# Altium PCB HUZZAH32.PcbDoc (part 1 of 2)
Units mm, origin at the board's own origin, x right, y up, seen from the top; angles counter-clockwise.
Board outline 50.95 x 23.01 mm, 2 copper layers (Top Layer, Bottom Layer); 30 components, 43 nets, 184 pads, 134 vias.
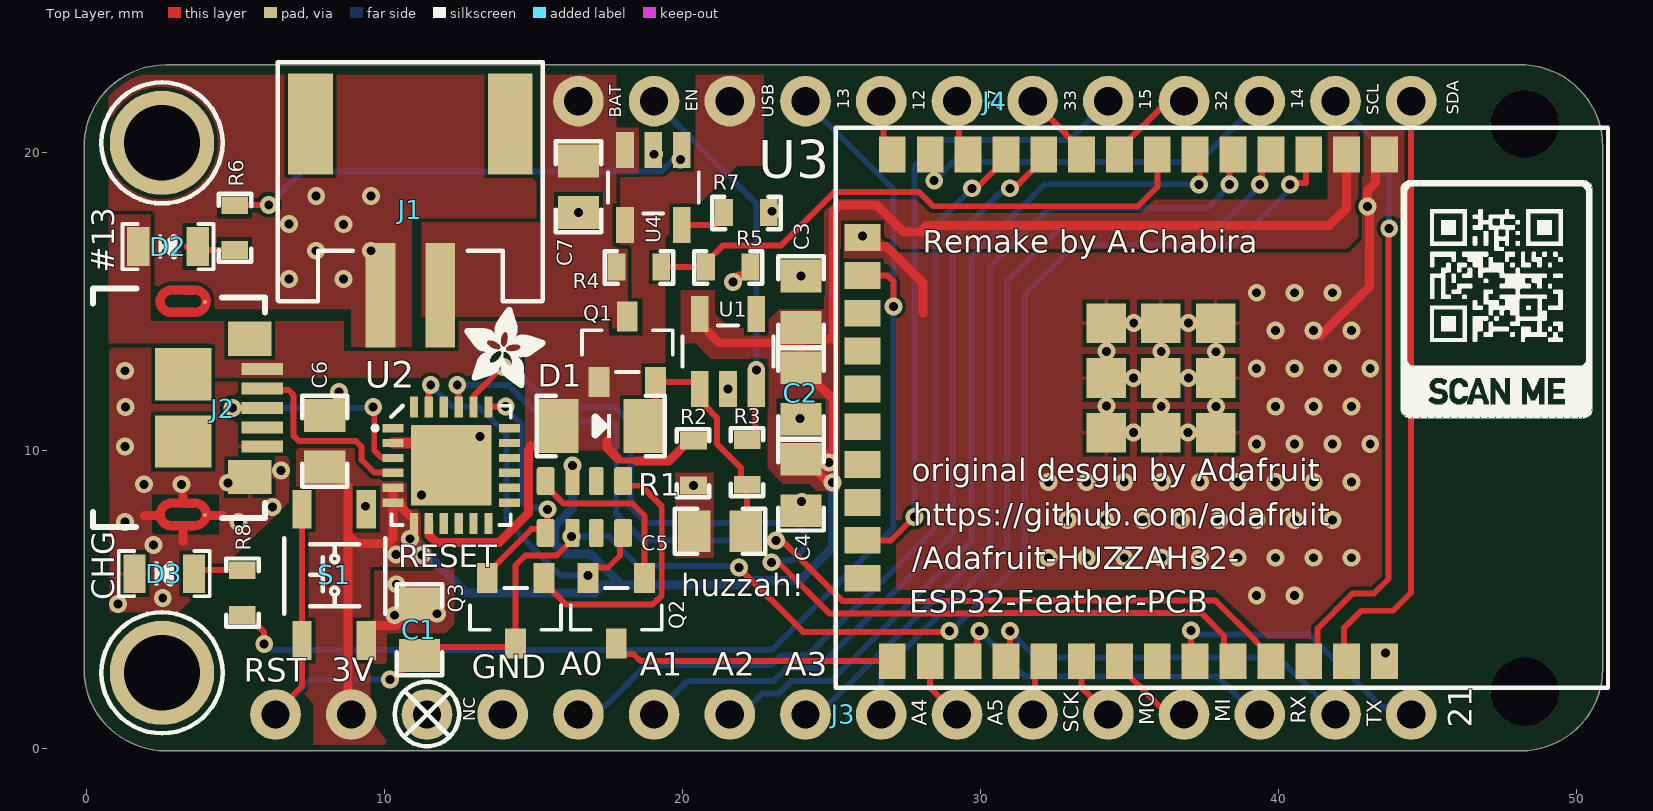
[diagram p0: Top Layer view]
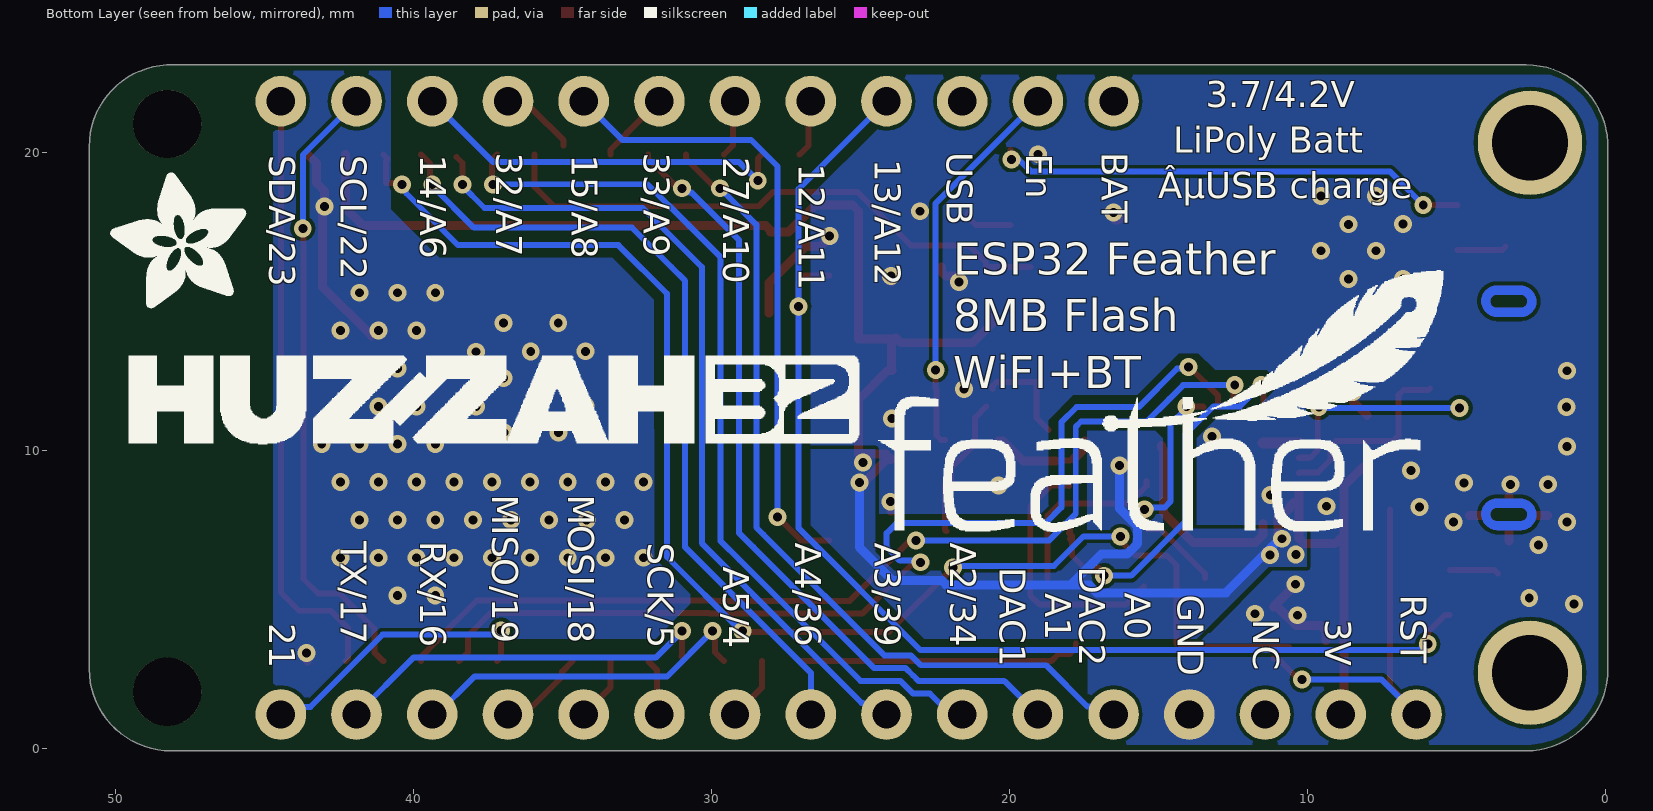
[diagram p1: Bottom Layer view, seen from below]
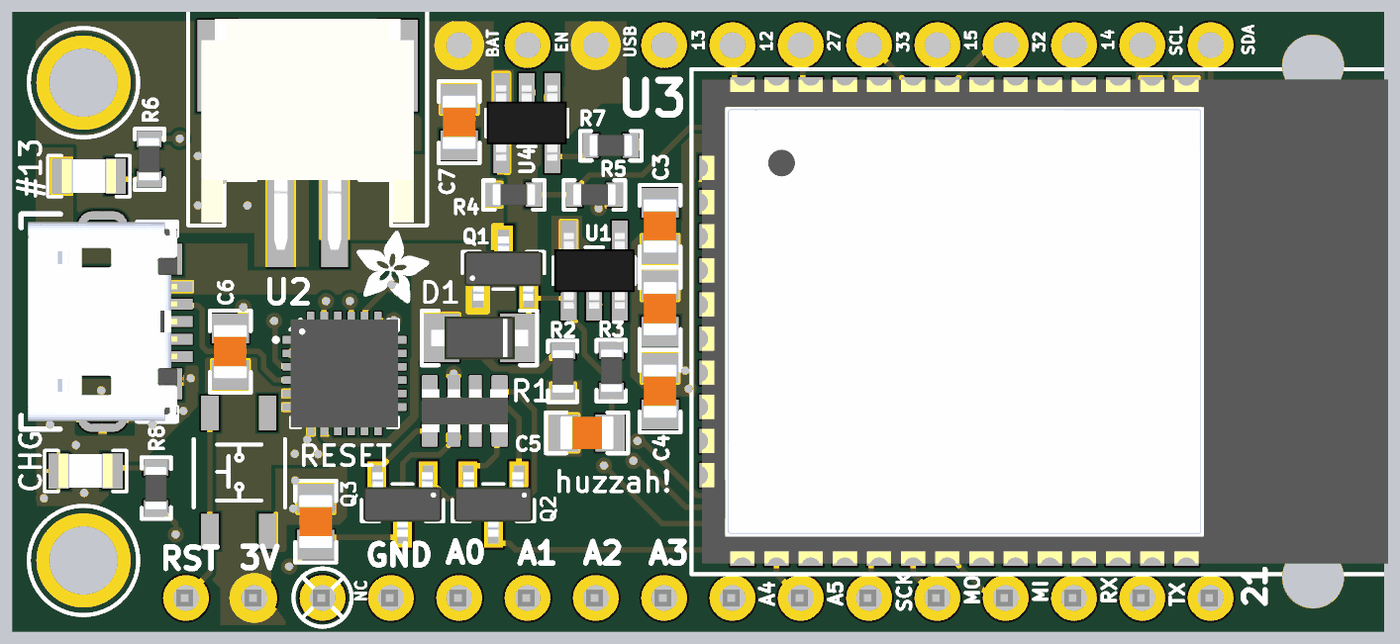
[diagram p2: 3D render of the assembled board from above, using the file's embedded part models]

## Layer stack, top to bottom
Top Solder: solder mask 0.0102, Solder Resist, Dk 3.5
Top Layer: signal copper 0.0356
Dielectric 1: dielectric 0.32, FR-4, Dk 4.8
Bottom Layer: signal copper 0.0356
Bottom Solder: solder mask 0.0102, Solder Resist, Dk 3.5

## Board outline
-0.077,2.667 cw(c0,2.667) -0.075,2.681 -0.075,20.179 cw(c0,20.193) -0.077,20.193 cw(c2.667,20.193) -0.075,20.274 -0.075,20.32 cw(c0,20.32) -0.073,20.34 cw(c2.667,20.193) 2.667,22.937 cw(c2.667,22.86) 2.681,22.935 48.119,22.935 cw(c48.133,22.86) 48.133,22.937 cw(c48.133,20.193) 48.214,22.935 48.26,22.935 cw(c48.26,22.86) 48.28,22.933 cw(c48.133,20.193) 50.877,20.193 cw(c50.8,20.193) 50.875,20.179 50.875,2.681 cw(c50.8,2.667) 50.877,2.667 cw(c48.133,2.667) 48.133,-0.077 cw(c48.133,0) 48.119,-0.075 2.681,-0.075 cw(c2.667,0) 2.667,-0.077 cw(c2.667,2.667)

## Design rules (kind name [scope] priority, off if disabled: settings)
BoardOutlineClearance [All] p1: gap=0.2 ignorepadtopadclearanceinfootprint=FALSE
Clearance [All] p1: gap=0.127 ignorepadtopadclearanceinfootprint=FALSE except(0.25: Arc-Hole Track-Hole SMDPad-Hole THPad-Hole Via-Hole Fill-Hole Poly-Hole Region-Hole Text-Hole)
ComponentClearance [All] p1: gap=0.127 collisioncheckmode=3 verticalgap=0.127 showdistances=TRUE
DiffPairsRouting [All] p1: maxlimit=0.254 minlimit=0.127 mostfreqgap=0.127 toplayer_minwidth=0.127 toplayer_maxwidth=25.4 toplayer_prefwidth=0.127 bottomlayer_minwidth=0.127 bottomlayer_maxwidth=25.4 bottomlayer_prefwidth=0.127 maxuncoupledlength=12.7
Height [All] p1: minheight=0 maxheight=1816.048 prefheight=12.7
HoleSize [All] p1: absolutevalues=TRUE maxlimit=6.3 minlimit=0.3 maxpercent=80.000 minpercent=20.000
HoleToHoleClearance [All] p1: gap=0.25 allowstackedmicrovias=FALSE
MinimumAnnularRing [All] p1: minimumring=0.076
MinimumSolderMaskSliver [All] p1: minsoldermaskwidth=0
PlaneClearance [All] p1: clearance=0.127
PlaneConnect PlaneConnectPowerPads [InPadClass('PowerPads')] p1: planeconnectstyle=Direct reliefexpansion=0.508 reliefentries=4 reliefconductorwidth=0.254 reliefairgap=0.254
PlaneConnect [All] p2: pad.planeconnectstyle=Relief pad.reliefexpansion=0.3 pad.reliefentries=4 pad.reliefconductorwidth=0.127 pad.reliefairgap=0.127 via.planeconnectstyle=Direct via.reliefexpansion=0.3 via.reliefentries=4 via.reliefconductorwidth=0.127 via.reliefairgap=0.127
PolygonConnect PolygonConnect_1 [IsNamedPolygon('GND_L01_THERMAL') or IsNamedPolygon('GND_L01_P018')] p1: thpad.connectstyle=Relief thpad.reliefconductorwidth=0.127 thpad.reliefentries=4 thpad.polygonreliefangle="90 Angle" thpad.airgapwidth=0.254 smdpad.connectstyle=Relief smdpad.reliefconductorwidth=0.127 smdpad.reliefentries=4 smdpad.polygonreliefangle="90 Angle" smdpad.airgapwidth=0.127 via.connectstyle=Direct via.reliefconductorwidth=0.127 via.reliefentries=4 via.polygonreliefangle="90 Angle" via.airgapwidth=0.127
PolygonConnect PolygonConnectPowerPads [All vs (InPadClass('PowerPads'))] p2: connectstyle=Direct reliefconductorwidth=0.254 reliefentries=4 polygonreliefangle="90 Angle" airgapwidth=0.254
PolygonConnect [All] p3: connectstyle=Direct reliefconductorwidth=0.127 reliefentries=4 polygonreliefangle="90 Angle" airgapwidth=0.127
RoutingVias [All] p1: holewidth=0.3 width=0.6 viastyle="Through Hole" minholewidth=0.3 minwidth=0.6 maxholewidth=0.6 maxwidth=6.6
SilkToSilkClearance [All] p1: silktosilkclearance=0
SilkToSolderMaskClearance [IsPad] p1: minsilkscreentomaskgap=0.127 clearancetoexposedcopper=TRUE
SolderMaskExpansion [All] p1: expansion=0.075 istentingtop=FALSE
Width [All] p1: maxlimit=25.4 minlimit=0.127 preferedwidth=0.127 minimp=50.000000 maximp=50.000000 favimp=50.000000
20 further rules are at their usual default settings.

## Classes and differential pairs
net class Power: 3V3 GND VBAT VBUS

## Components (designator, comment, footprint, x,y, rotation, side; value= is the part's Value field where it differs from the comment)
C1 "1uF" CERAMIC_0805 11.176,3.988 r270 top
C2 "10uF" CERAMIC_0805 23.978,11.913 r90 top
C3 "1uF" CERAMIC_0805 23.978,14.986 r270 top
C4 "10uF" CERAMIC_0805 23.978,8.839 r90 top
C5 "10uF" CERAMIC_0805 21.26,7.29 r0 top
C6 "10uF" CERAMIC_0805 8.001,10.312 r90 top
C7 "10uF" CERAMIC_0805 16.51,18.847 r90 top
D1 "Schottky" SOD-123F 17.272,10.82 r180 top
D2 "ORANGE" LED_0805 2.743,16.84 r0 top
D3 "RED" LED_0805 2.616,5.867 r0 top locked
J1 "JST PH Conn" JST_PH_CONN_F_SMD 10.874,14.905 r0 top
J2 "USB micro" USB_CONN 3.251,11.43 r270 top locked
J3 "HDR_16" HDR_16 6.35,1.143 r90 top locked
J4 "HDR_16" HDR_12 16.51,21.717 r90 top locked
Q1 "P Channel MOSFET" SOT23-3 18.151,13.396 r0 top
Q2 "BJT" SOT23-3 17.78,4.623 r180 top
Q3 "BJT" SOT23-3 14.402,4.623 r180 top
R1 "10k" SMD_4_RES_ARRAY_1206 16.713,8.103 r270 top
R2 "100k" R_0603 20.371,9.576 r90 top
R3 "100k" R_0603 22.174,9.601 r90 top
R4 "100k" R_0603 18.542,16.154 r180 top
R5 "100k" R_0603 21.539,16.154 r180 top
R6 "1k" R_0603 4.978,17.475 r270 top locked
R7 "4.7k" R_0603 22.149,17.983 r180 top
R8 "1k" R_0603 5.232,5.232 r270 top locked
S1 "Push Button" SW_PB_6643 7.239,3.626 r90 top locked
U1 "3V3 LDO" SOT23-5 21.529,13.32 r0 top
U2 "USB to UART converter" QFN_24 12.243,9.5 r0 top
U3 "ESP32-WROOM" ESP32_WROOM_MODULE 34.798,11.43 r270 top locked
U4 "IC BATT Conctroller" SOT23-5 19.025,18.821 r180 top

## Footprints (in the part's own frame and the unit in brackets; to place one, negate y for a bottom-side part, rotate by r counter-clockwise, add the part's x,y. Pads: shape width x height; smd on the part's side, far side on the other; paste and mask are expansions set on the pad)
CERAMIC_0805 [mm]
  rect 1.1x1.38 smd: 1(-0.863,0) 2(0.863,0)
  silkscreen extent -1.52,-0.76 1.52,0.76, body extent -1,-0.63 1,0.62, height 1.35
ESP32_WROOM_MODULE [mm]
  rect 1.2x0.9 smd: 1(-8.5,8.755) 2(-8.5,7.485) 3(-8.5,6.215) 4(-8.5,4.945) 5(-8.5,3.675) 6(-8.5,2.405) 7(-8.5,1.135) 8(-8.5,-0.135) 9(-8.5,-1.405) 10(-8.5,-2.675) 11(-8.5,-3.945) 12(-8.5,-5.215) 13(-8.5,-6.485) 14(-8.5,-7.755) 25(8.5,-7.755) 26(8.5,-6.485) 27(8.5,-5.215) 28(8.5,-3.945) 29(8.5,-2.675) 30(8.5,-1.405) 31(8.5,-0.135) 32(8.5,1.135) 33(8.5,2.405) 34(8.5,3.675) 35(8.5,4.945) 36(8.5,6.215) 37(8.5,7.485) 38(8.5,8.755)
  rect 0.9x1.2 smd: 15(-5.715,-8.755) 16(-4.445,-8.755) 17(-3.175,-8.755) 18(-1.905,-8.755) 19(-0.635,-8.755) 20(0.635,-8.755) 21(1.905,-8.755) 22(3.175,-8.755) 23(4.445,-8.755) 24(5.715,-8.755)
  rect 1.33x1.33 smd: 39(-2.835,3.09) 39(-2.835,1.255) 39(-2.835,-0.58) 39(-1,3.09) 39(-1,1.255) 39(-1,-0.58) 39(0.835,3.09) 39(0.835,1.255) 39(0.835,-0.58)
  silkscreen extent -9.4,-9.65 9.4,16.26, body extent -9,-9.25 9,16.25, height 3.2
HDR_12 [mm]
  round 1.7 hole 0.95: 1(0,0) 2(0,-2.54) 3(0,-5.08) 4(0,-7.62) 5(0,-10.16) 6(0,-12.7) 7(0,-15.24) 8(0,-17.78) 9(0,-20.32) 10(0,-22.86) 11(0,-25.4) 12(0,-27.94)
  body extent -1.17,-28.94 1.17,1.14, height 2.33
HDR_16 [mm]
  round 1.7 hole 0.95: 1(0,-38.1) 2(0,-35.56) 3(0,-33.02) 4(0,-30.48) 5(0,-27.94) 6(0,-25.4) 7(0,-22.86) 8(0,-20.32) 9(0,-17.78) 10(0,-15.24) 11(0,-12.7) 12(0,-10.16) 13(0,-7.62) 14(0,-5.08) 15(0,-2.54) 16(0,0)
  body extent -1.24,-39.32 1.24,1.32, height 2.29
JST_PH_CONN_F_SMD [mm]
  rect 1x3.5 smd: 1(-1,0.3) 2(1,0.3)
  rect 1.5x3.4 smd: S1(3.35,6.05) S2(-3.35,6.05)
  silkscreen extent -4.45,0.1 4.44,8.13, body extent -3.95,-0.8 3.95,7.8, height 5.7
LED_0805 [mm]
  rect 0.75x1.3 smd: 1(1,0) 2(-1,0)
  silkscreen extent -1.52,-0.76 1.52,0.76, body extent -1,-0.62 1,0.62, height 0.73
QFN_24 [mm]
  rrect10% 0.7x0.28 smd paste+0 mask+0.05: 1(-1.955,1.25) 2(-1.955,0.75) 3(-1.955,0.25) 4(-1.955,-0.25) 5(-1.955,-0.75) 6(-1.955,-1.25) 13(1.955,-1.25) 14(1.955,-0.75) 15(1.955,-0.25) 16(1.955,0.25) 17(1.955,0.75) 18(1.955,1.25)
  rrect10% 0.28x0.7 smd paste+0 mask+0.05: 7(-1.25,-1.955) 8(-0.75,-1.955) 9(-0.25,-1.955) 10(0.25,-1.955) 11(0.75,-1.955) 12(1.25,-1.955) 19(1.25,1.955) 20(0.75,1.955) 21(0.25,1.955) 22(-0.25,1.955) 23(-0.75,1.955) 24(-1.25,1.955)
  rrect2% 2.7x2.7 smd paste-2 mask+0.06: 25(0,0)
  silkscreen extent -2.62,-2 2,2, body extent -2,-2 2,2, height 0.77
R_0603 [mm]
  rect 0.6x0.9 smd: 1(-0.75,0) 2(0.75,0)
  silkscreen extent -1.14,-0.53 1.14,0.56, body extent -0.8,-0.4 0.8,0.4, height 0.85
SMD_4_RES_ARRAY_1206 [mm]
  rrect20% 0.93x0.6 smd mask+0.051: 1(-0.87,1.3) 2(0.87,1.3) 7(-0.87,-1.3) 8(0.87,-1.3)
  rrect20% 0.93x0.48 smd mask+0.051: 3(-0.87,0.4) 4(0.87,0.4) 5(-0.87,-0.4) 6(0.87,-0.4)
  body extent -0.8,-1.6 0.8,1.6, height 0.6
SOD-123F [mm]
  rect 1.34x1.8 smd: 1(1.43,0) 2(-1.43,0)
  silkscreen extent -2.13,-1.02 2.16,1.02, body extent -1.8,-0.8 1.8,0.8, height 1.15
SOT23-3 [mm]
  rect 0.7x1 smd paste-0.15 mask+0.102: 1(-0.95,-1.1) 2(0.95,-1.1) 3(0,1.1)
  silkscreen extent -1.52,-0.76 1.52,0.64, body extent -1.45,-1.2 1.45,1.2, height 1.1
SOT23-5 [mm]
  rect 0.59x1.21 smd: 1(-0.95,-1.255) 2(0,-1.255) 3(0.95,-1.255) 4(0.95,1.255) 5(-0.95,1.255)
  silkscreen extent -1.52,-0.51 1.52,0.87, body extent -1.49,-1.4 1.5,1.4, height 1.17
SW_PB_6643 [mm]
  rect 1.3x0.65 smd: 1(0,0) 2(4.4,0) 3(0,-2.15) 4(4.4,-2.15)
  silkscreen extent 0.89,-2.79 3.43,0.6, body extent -0.55,-2.78 4.95,0.63, height 3.07
USB_CONN [mm]
  rect 0.4x1.4 smd mask+0.05: 1(-1.3,2.65) 2(-0.65,2.65) 3(0,2.65) 4(0.66,2.65) 5(1.3,2.65)
  rect 0.1x0.1 smd paste-1 mask+0: 6(-3.549,0.73) 7(3.601,0.73)
  rect 1.15x1.45 smd mask+0.05: 8(-2.32,2.23) 9(2.32,2.23)
  rect 1.75x1.9 smd: 10(-1.125,0) 11(1.125,0)
  Top Layer region: -3.542,0.923 -3.514,0.919 -3.486,0.914 -3.458,0.907 -3.43,0.899 -3.403,0.889 -3.376,0.878 -3.35,0.866 -3.325,0.852 -3.3,0.837 -3.276,0.82 -3.254,0.803 -3.232,0.784 -3.211,0.764 -3.191,0.743 -3.172,0.721 -3.155,0.699 -3.138,0.675 -3.123,0.65 -3.109,0.625 -3.097,0.599 -3.086,0.572 -3.076,0.545 -3.068,0.517 -3.061,0.489 -3.056,0.461 -3.052,0.433 -3.05,0.404 -3.049,0.375 -3.05,0.35 -3.05,0 -3.35,0 -3.35,0.4 -3.35,0.412 -3.351,0.424 -3.353,0.435 -3.355,0.447 -3.358,0.458 -3.361,0.47 -3.365,0.481 -3.369,0.492 -3.375,0.502 -3.38,0.513 -3.386,0.523 -3.393,0.532 -3.4,0.542 -3.408,0.551 -3.416,0.559 -3.424,0.567 -3.433,0.575 -3.443,0.582 -3.452,0.589 -3.463,0.595 -3.473,0.6 -3.483,0.606 -3.494,0.61 -3.505,0.614 -3.517,0.617 -3.528,0.62 -3.54,0.622 -3.551,0.624 -3.563,0.625 -3.575,0.625 -3.587,0.625 -3.599,0.624 -3.61,0.622 -3.622,0.62 -3.633,0.617 -3.645,0.614 -3.656,0.61 -3.667,0.606 -3.677,0.6 -3.688,0.595 -3.698,0.589 -3.707,0.582 -3.717,0.575 -3.726,0.567 -3.734,0.559 -3.742,0.551 -3.75,0.542 -3.757,0.532 -3.764,0.523 -3.77,0.513 -3.775,0.502 -3.781,0.492 -3.785,0.481 -3.789,0.47 -3.792,0.458 -3.795,0.447 -3.797,0.435 -3.799,0.424 -3.8,0.412 -3.8,0.4 -3.8,0 -4.1,0 -4.1,0.4 -4.099,0.427 -4.097,0.455 -4.094,0.482 -4.089,0.509 -4.082,0.536 -4.074,0.562 -4.065,0.588 -4.055,0.614 -4.043,0.638 -4.03,0.663 -4.015,0.686 -4,0.709 -3.983,0.73 -3.965,0.751 -3.946,0.771 -3.926,0.79 -3.905,0.808 -3.884,0.825 -3.861,0.84 -3.838,0.855 -3.813,0.868 -3.789,0.88 -3.763,0.89 -3.737,0.899 -3.711,0.907 -3.684,0.914 -3.657,0.919 -3.63,0.922 -3.602,0.924 -3.575,0.925
  Top Layer region: -3.05,-0.4 -3.051,-0.427 -3.053,-0.455 -3.056,-0.482 -3.061,-0.509 -3.068,-0.536 -3.076,-0.562 -3.085,-0.588 -3.095,-0.614 -3.107,-0.638 -3.12,-0.663 -3.135,-0.686 -3.15,-0.709 -3.167,-0.73 -3.185,-0.751 -3.204,-0.771 -3.224,-0.79 -3.245,-0.808 -3.266,-0.825 -3.289,-0.84 -3.313,-0.855 -3.337,-0.868 -3.361,-0.88 -3.387,-0.89 -3.413,-0.899 -3.439,-0.907 -3.466,-0.914 -3.493,-0.919 -3.52,-0.922 -3.548,-0.924 -3.575,-0.925 -3.608,-0.923 -3.636,-0.919 -3.664,-0.914 -3.692,-0.907 -3.72,-0.899 -3.747,-0.889 -3.774,-0.878 -3.8,-0.866 -3.825,-0.852 -3.85,-0.837 -3.874,-0.82 -3.896,-0.803 -3.918,-0.784 -3.939,-0.764 -3.959,-0.743 -3.978,-0.721 -3.995,-0.699 -4.012,-0.675 -4.027,-0.65 -4.041,-0.625 -4.053,-0.599 -4.064,-0.572 -4.074,-0.545 -4.082,-0.517 -4.089,-0.489 -4.094,-0.461 -4.098,-0.433 -4.1,-0.404 -4.101,-0.375 -4.1,-0.35 -4.1,0 -3.8,0 -3.8,-0.4 -3.8,-0.412 -3.799,-0.424 -3.797,-0.435 -3.795,-0.447 -3.792,-0.458 -3.789,-0.47 -3.785,-0.481 -3.781,-0.492 -3.775,-0.502 -3.77,-0.513 -3.764,-0.523 -3.757,-0.532 -3.75,-0.542 -3.742,-0.551 -3.734,-0.559 -3.726,-0.567 -3.717,-0.575 -3.707,-0.582 -3.698,-0.589 -3.688,-0.595 -3.677,-0.6 -3.667,-0.606 -3.656,-0.61 -3.645,-0.614 -3.633,-0.617 -3.622,-0.62 -3.61,-0.622 -3.599,-0.624 -3.587,-0.625 -3.575,-0.625 -3.563,-0.625 -3.551,-0.624 -3.54,-0.622 -3.528,-0.62 -3.517,-0.617 -3.505,-0.614 -3.494,-0.61 -3.483,-0.606 -3.473,-0.6 -3.463,-0.595 -3.452,-0.589 -3.443,-0.582 -3.433,-0.575 -3.424,-0.567 -3.416,-0.559 -3.408,-0.551 -3.4,-0.542 -3.393,-0.532 -3.386,-0.523 -3.38,-0.513 -3.375,-0.502 -3.369,-0.492 -3.365,-0.481 -3.361,-0.47 -3.358,-0.458 -3.355,-0.447 -3.353,-0.435 -3.351,-0.424 -3.35,-0.412 -3.35,-0.4 -3.35,0 -3.05,0
  Top Layer region: 3.608,0.923 3.636,0.919 3.664,0.914 3.692,0.907 3.72,0.899 3.747,0.889 3.774,0.878 3.8,0.866 3.825,0.852 3.85,0.837 3.874,0.82 3.896,0.803 3.918,0.784 3.939,0.764 3.959,0.743 3.978,0.721 3.995,0.699 4.012,0.675 4.027,0.65 4.041,0.625 4.053,0.599 4.064,0.572 4.074,0.545 4.082,0.517 4.089,0.489 4.094,0.461 4.098,0.433 4.1,0.404 4.101,0.375 4.1,0.35 4.1,0 3.8,0 3.8,0.4 3.8,0.412 3.799,0.424 3.797,0.435 3.795,0.447 3.792,0.458 3.789,0.47 3.785,0.481 3.781,0.492 3.775,0.502 3.77,0.513 3.764,0.523 3.757,0.532 3.75,0.542 3.742,0.551 3.734,0.559 3.726,0.567 3.717,0.575 3.707,0.582 3.698,0.589 3.688,0.595 3.677,0.6 3.667,0.606 3.656,0.61 3.645,0.614 3.633,0.617 3.622,0.62 3.61,0.622 3.599,0.624 3.587,0.625 3.575,0.625 3.563,0.625 3.551,0.624 3.54,0.622 3.528,0.62 3.517,0.617 3.505,0.614 3.494,0.61 3.483,0.606 3.473,0.6 3.463,0.595 3.452,0.589 3.443,0.582 3.433,0.575 3.424,0.567 3.416,0.559 3.408,0.551 3.4,0.542 3.393,0.532 3.386,0.523 3.38,0.513 3.375,0.502 3.369,0.492 3.365,0.481 3.361,0.47 3.358,0.458 3.355,0.447 3.353,0.435 3.351,0.424 3.35,0.412 3.35,0.4 3.35,0 3.05,0 3.05,0.4 3.051,0.427 3.053,0.455 3.056,0.482 3.061,0.509 3.068,0.536 3.076,0.562 3.085,0.588 3.095,0.614 3.107,0.638 3.12,0.663 3.135,0.686 3.15,0.709 3.167,0.73 3.185,0.751 3.204,0.771 3.224,0.79 3.245,0.808 3.266,0.825 3.289,0.84 3.313,0.855 3.337,0.868 3.361,0.88 3.387,0.89 3.413,0.899 3.439,0.907 3.466,0.914 3.493,0.919 3.52,0.922 3.548,0.924 3.575,0.925
  Top Layer region: 4.1,-0.4 4.099,-0.427 4.097,-0.455 4.094,-0.482 4.089,-0.509 4.082,-0.536 4.074,-0.562 4.065,-0.588 4.055,-0.614 4.043,-0.638 4.03,-0.663 4.015,-0.686 4,-0.709 3.983,-0.73 3.965,-0.751 3.946,-0.771 3.926,-0.79 3.905,-0.808 3.884,-0.825 3.861,-0.84 3.838,-0.855 3.813,-0.868 3.789,-0.88 3.763,-0.89 3.737,-0.899 3.711,-0.907 3.684,-0.914 3.657,-0.919 3.63,-0.922 3.602,-0.924 3.575,-0.925 3.542,-0.923 3.514,-0.919 3.486,-0.914 3.458,-0.907 3.43,-0.899 3.403,-0.889 3.376,-0.878 3.35,-0.866 3.325,-0.852 3.3,-0.837 3.276,-0.82 3.254,-0.803 3.232,-0.784 3.211,-0.764 3.191,-0.743 3.172,-0.721 3.155,-0.699 3.138,-0.675 3.123,-0.65 3.109,-0.625 3.097,-0.599 3.086,-0.572 3.076,-0.545 3.068,-0.517 3.061,-0.489 3.056,-0.461 3.052,-0.433 3.05,-0.404 3.049,-0.375 3.05,-0.35 3.05,0 3.35,0 3.35,-0.4 3.35,-0.412 3.351,-0.424 3.353,-0.435 3.355,-0.447 3.358,-0.458 3.361,-0.47 3.365,-0.481 3.369,-0.492 3.375,-0.502 3.38,-0.513 3.386,-0.523 3.393,-0.532 3.4,-0.542 3.408,-0.551 3.416,-0.559 3.424,-0.567 3.433,-0.575 3.443,-0.582 3.452,-0.589 3.463,-0.595 3.473,-0.6 3.483,-0.606 3.494,-0.61 3.505,-0.614 3.517,-0.617 3.528,-0.62 3.54,-0.622 3.551,-0.624 3.563,-0.625 3.575,-0.625 3.587,-0.625 3.599,-0.624 3.61,-0.622 3.622,-0.62 3.633,-0.617 3.645,-0.614 3.656,-0.61 3.667,-0.606 3.677,-0.6 3.688,-0.595 3.698,-0.589 3.707,-0.582 3.717,-0.575 3.726,-0.567 3.734,-0.559 3.742,-0.551 3.75,-0.542 3.757,-0.532 3.764,-0.523 3.77,-0.513 3.775,-0.502 3.781,-0.492 3.785,-0.481 3.789,-0.47 3.792,-0.458 3.795,-0.447 3.797,-0.435 3.799,-0.424 3.8,-0.412 3.8,-0.4 3.8,0 4.1,0
  Bottom Layer region: -3.542,0.923 -3.514,0.919 -3.486,0.914 -3.458,0.907 -3.43,0.899 -3.403,0.889 -3.376,0.878 -3.35,0.866 -3.325,0.852 -3.3,0.837 -3.276,0.82 -3.254,0.803 -3.232,0.784 -3.211,0.764 -3.191,0.743 -3.172,0.721 -3.155,0.699 -3.138,0.675 -3.123,0.65 -3.109,0.625 -3.097,0.599 -3.086,0.572 -3.076,0.545 -3.068,0.517 -3.061,0.489 -3.056,0.461 -3.052,0.433 -3.05,0.404 -3.049,0.375 -3.05,0.35 -3.05,0 -3.35,0 -3.35,0.4 -3.35,0.412 -3.351,0.424 -3.353,0.435 -3.355,0.447 -3.358,0.458 -3.361,0.47 -3.365,0.481 -3.369,0.492 -3.375,0.502 -3.38,0.513 -3.386,0.523 -3.393,0.532 -3.4,0.542 -3.408,0.551 -3.416,0.559 -3.424,0.567 -3.433,0.575 -3.443,0.582 -3.452,0.589 -3.463,0.595 -3.473,0.6 -3.483,0.606 -3.494,0.61 -3.505,0.614 -3.517,0.617 -3.528,0.62 -3.54,0.622 -3.551,0.624 -3.563,0.625 -3.575,0.625 -3.587,0.625 -3.599,0.624 -3.61,0.622 -3.622,0.62 -3.633,0.617 -3.645,0.614 -3.656,0.61 -3.667,0.606 -3.677,0.6 -3.688,0.595 -3.698,0.589 -3.707,0.582 -3.717,0.575 -3.726,0.567 -3.734,0.559 -3.742,0.551 -3.75,0.542 -3.757,0.532 -3.764,0.523 -3.77,0.513 -3.775,0.502 -3.781,0.492 -3.785,0.481 -3.789,0.47 -3.792,0.458 -3.795,0.447 -3.797,0.435 -3.799,0.424 -3.8,0.412 -3.8,0.4 -3.8,0 -4.1,0 -4.1,0.4 -4.099,0.427 -4.097,0.455 -4.094,0.482 -4.089,0.509 -4.082,0.536 -4.074,0.562 -4.065,0.588 -4.055,0.614 -4.043,0.638 -4.03,0.663 -4.015,0.686 -4,0.709 -3.983,0.73 -3.965,0.751 -3.946,0.771 -3.926,0.79 -3.905,0.808 -3.884,0.825 -3.861,0.84 -3.838,0.855 -3.813,0.868 -3.789,0.88 -3.763,0.89 -3.737,0.899 -3.711,0.907 -3.684,0.914 -3.657,0.919 -3.63,0.922 -3.602,0.924 -3.575,0.925
  Bottom Layer region: -3.05,-0.4 -3.051,-0.427 -3.053,-0.455 -3.056,-0.482 -3.061,-0.509 -3.068,-0.536 -3.076,-0.562 -3.085,-0.588 -3.095,-0.614 -3.107,-0.638 -3.12,-0.663 -3.135,-0.686 -3.15,-0.709 -3.167,-0.73 -3.185,-0.751 -3.204,-0.771 -3.224,-0.79 -3.245,-0.808 -3.266,-0.825 -3.289,-0.84 -3.313,-0.855 -3.337,-0.868 -3.361,-0.88 -3.387,-0.89 -3.413,-0.899 -3.439,-0.907 -3.466,-0.914 -3.493,-0.919 -3.52,-0.922 -3.548,-0.924 -3.575,-0.925 -3.608,-0.923 -3.636,-0.919 -3.664,-0.914 -3.692,-0.907 -3.72,-0.899 -3.747,-0.889 -3.774,-0.878 -3.8,-0.866 -3.825,-0.852 -3.85,-0.837 -3.874,-0.82 -3.896,-0.803 -3.918,-0.784 -3.939,-0.764 -3.959,-0.743 -3.978,-0.721 -3.995,-0.699 -4.012,-0.675 -4.027,-0.65 -4.041,-0.625 -4.053,-0.599 -4.064,-0.572 -4.074,-0.545 -4.082,-0.517 -4.089,-0.489 -4.094,-0.461 -4.098,-0.433 -4.1,-0.404 -4.101,-0.375 -4.1,-0.35 -4.1,0 -3.8,0 -3.8,-0.4 -3.8,-0.412 -3.799,-0.424 -3.797,-0.435 -3.795,-0.447 -3.792,-0.458 -3.789,-0.47 -3.785,-0.481 -3.781,-0.492 -3.775,-0.502 -3.77,-0.513 -3.764,-0.523 -3.757,-0.532 -3.75,-0.542 -3.742,-0.551 -3.734,-0.559 -3.726,-0.567 -3.717,-0.575 -3.707,-0.582 -3.698,-0.589 -3.688,-0.595 -3.677,-0.6 -3.667,-0.606 -3.656,-0.61 -3.645,-0.614 -3.633,-0.617 -3.622,-0.62 -3.61,-0.622 -3.599,-0.624 -3.587,-0.625 -3.575,-0.625 -3.563,-0.625 -3.551,-0.624 -3.54,-0.622 -3.528,-0.62 -3.517,-0.617 -3.505,-0.614 -3.494,-0.61 -3.483,-0.606 -3.473,-0.6 -3.463,-0.595 -3.452,-0.589 -3.443,-0.582 -3.433,-0.575 -3.424,-0.567 -3.416,-0.559 -3.408,-0.551 -3.4,-0.542 -3.393,-0.532 -3.386,-0.523 -3.38,-0.513 -3.375,-0.502 -3.369,-0.492 -3.365,-0.481 -3.361,-0.47 -3.358,-0.458 -3.355,-0.447 -3.353,-0.435 -3.351,-0.424 -3.35,-0.412 -3.35,-0.4 -3.35,0 -3.05,0
  Bottom Layer region: 3.608,0.923 3.636,0.919 3.664,0.914 3.692,0.907 3.72,0.899 3.747,0.889 3.774,0.878 3.8,0.866 3.825,0.852 3.85,0.837 3.874,0.82 3.896,0.803 3.918,0.784 3.939,0.764 3.959,0.743 3.978,0.721 3.995,0.699 4.012,0.675 4.027,0.65 4.041,0.625 4.053,0.599 4.064,0.572 4.074,0.545 4.082,0.517 4.089,0.489 4.094,0.461 4.098,0.433 4.1,0.404 4.101,0.375 4.1,0.35 4.1,0 3.8,0 3.8,0.4 3.8,0.412 3.799,0.424 3.797,0.435 3.795,0.447 3.792,0.458 3.789,0.47 3.785,0.481 3.781,0.492 3.775,0.502 3.77,0.513 3.764,0.523 3.757,0.532 3.75,0.542 3.742,0.551 3.734,0.559 3.726,0.567 3.717,0.575 3.707,0.582 3.698,0.589 3.688,0.595 3.677,0.6 3.667,0.606 3.656,0.61 3.645,0.614 3.633,0.617 3.622,0.62 3.61,0.622 3.599,0.624 3.587,0.625 3.575,0.625 3.563,0.625 3.551,0.624 3.54,0.622 3.528,0.62 3.517,0.617 3.505,0.614 3.494,0.61 3.483,0.606 3.473,0.6 3.463,0.595 3.452,0.589 3.443,0.582 3.433,0.575 3.424,0.567 3.416,0.559 3.408,0.551 3.4,0.542 3.393,0.532 3.386,0.523 3.38,0.513 3.375,0.502 3.369,0.492 3.365,0.481 3.361,0.47 3.358,0.458 3.355,0.447 3.353,0.435 3.351,0.424 3.35,0.412 3.35,0.4 3.35,0 3.05,0 3.05,0.4 3.051,0.427 3.053,0.455 3.056,0.482 3.061,0.509 3.068,0.536 3.076,0.562 3.085,0.588 3.095,0.614 3.107,0.638 3.12,0.663 3.135,0.686 3.15,0.709 3.167,0.73 3.185,0.751 3.204,0.771 3.224,0.79 3.245,0.808 3.266,0.825 3.289,0.84 3.313,0.855 3.337,0.868 3.361,0.88 3.387,0.89 3.413,0.899 3.439,0.907 3.466,0.914 3.493,0.919 3.52,0.922 3.548,0.924 3.575,0.925
  Bottom Layer region: 4.1,-0.4 4.099,-0.427 4.097,-0.455 4.094,-0.482 4.089,-0.509 4.082,-0.536 4.074,-0.562 4.065,-0.588 4.055,-0.614 4.043,-0.638 4.03,-0.663 4.015,-0.686 4,-0.709 3.983,-0.73 3.965,-0.751 3.946,-0.771 3.926,-0.79 3.905,-0.808 3.884,-0.825 3.861,-0.84 3.838,-0.855 3.813,-0.868 3.789,-0.88 3.763,-0.89 3.737,-0.899 3.711,-0.907 3.684,-0.914 3.657,-0.919 3.63,-0.922 3.602,-0.924 3.575,-0.925 3.542,-0.923 3.514,-0.919 3.486,-0.914 3.458,-0.907 3.43,-0.899 3.403,-0.889 3.376,-0.878 3.35,-0.866 3.325,-0.852 3.3,-0.837 3.276,-0.82 3.254,-0.803 3.232,-0.784 3.211,-0.764 3.191,-0.743 3.172,-0.721 3.155,-0.699 3.138,-0.675 3.123,-0.65 3.109,-0.625 3.097,-0.599 3.086,-0.572 3.076,-0.545 3.068,-0.517 3.061,-0.489 3.056,-0.461 3.052,-0.433 3.05,-0.404 3.049,-0.375 3.05,-0.35 3.05,0 3.35,0 3.35,-0.4 3.35,-0.412 3.351,-0.424 3.353,-0.435 3.355,-0.447 3.358,-0.458 3.361,-0.47 3.365,-0.481 3.369,-0.492 3.375,-0.502 3.38,-0.513 3.386,-0.523 3.393,-0.532 3.4,-0.542 3.408,-0.551 3.416,-0.559 3.424,-0.567 3.433,-0.575 3.443,-0.582 3.452,-0.589 3.463,-0.595 3.473,-0.6 3.483,-0.606 3.494,-0.61 3.505,-0.614 3.517,-0.617 3.528,-0.62 3.54,-0.622 3.551,-0.624 3.563,-0.625 3.575,-0.625 3.587,-0.625 3.599,-0.624 3.61,-0.622 3.622,-0.62 3.633,-0.617 3.645,-0.614 3.656,-0.61 3.667,-0.606 3.677,-0.6 3.688,-0.595 3.698,-0.589 3.707,-0.582 3.717,-0.575 3.726,-0.567 3.734,-0.559 3.742,-0.551 3.75,-0.542 3.757,-0.532 3.764,-0.523 3.77,-0.513 3.775,-0.502 3.781,-0.492 3.785,-0.481 3.789,-0.47 3.792,-0.458 3.795,-0.447 3.797,-0.435 3.799,-0.424 3.8,-0.412 3.8,-0.4 3.8,0 4.1,0
  silkscreen extent -4,-3.03 4,2.75, body extent -3.7,-2.77 3.7,2.78, height 2.66

## Part data
C1 C3: library part 1276-1026-1-ND, "1uF 16V ±10% 0805 MLCC", ComponentLink1Description="LCSC link 1", ComponentLink1URL=https://lcsc.com/product-detail/Multilayer-Ceramic-Capacitors-MLCC-SMD-SMT_Samsung-Electro-Mechanics-CL21B105KOFNNNE_C24123.html, Supplier 1=Digi-Key, Supplier 2=LCSC, Supplier Part Number 1=1276-1026-1-ND, Supplier Part Number 2=C24123
C2 C4 C5 C6 C7: library part 1276-1096-1-ND, "1uF 16V ±10% 0805 MLCC", ComponentLink1Description="LCSC link 1", ComponentLink1URL=https://lcsc.com/product-detail/Multilayer-Ceramic-Capacitors-MLCC-SMD-SMT_Samsung-Electro-Mechanics-CL21A106KOQNNNE_C1713.html, Supplier 1=Digi-Key, Supplier 2=LCSC, Supplier Part Number 1=1276-1096-1-ND, Supplier Part Number 2=C1713
D1: library part RB161MM-20CT-ND, "Diode Schottky 20 V 1A Surface Mount SOD-123FL", ComponentLink1Description="LCSC link 1", ComponentLink1URL=https://lcsc.com/product-detail/Schottky-Barrier-Diodes-SBD_ROHM-Semicon-RB161MM-20TR_C123070.html, Supplier 1=Digi-Key, Supplier 2=LCSC, Supplier Part Number 1=RB161MM-20CT-ND, Supplier Part Number 2=C123070
D2: library part LED_ORANGE, "LED ORANGE 20mA 2V 0805", Supplier Part Number 1=C284931, ComponentLink1Description="LCSC link 1", ComponentLink1URL=https://lcsc.com/product-detail/Light-Emitting-Diodes-LED_Lite-On-LTST-C170KFKT_C284931.html, Supplier 1=LCSC
D3: library part LED_RED, "LED RED 20mA 2V 0805", Supplier Part Number 1=C72037, ComponentLink1Description="LCSC link 1", ComponentLink1URL=https://lcsc.com/product-detail/Light-Emitting-Diodes-LED_Everlight-Elec-17-21SURC-S530-A3-TR8_C72037.html, Supplier 1=LCSC
J1: library part JST-PH, "1x2 JST PH 2mm SMD Connector", Suplier Part Number 3=C2688784, Suplier Part Number 4=C278789, Supplier Part Number 1=C47647, ComponentLink1Description="LCSC link 1", ComponentLink1URL=https://www.lcsc.com/product-detail/Wire-To-Board-Wire-To-Wire-Connector_BOOMELE-Boom-Precision-Elec-C47647_C47647.html, ComponentLink2Description="LCSC link 2", ComponentLink2URL=https://www.lcsc.com/product-detail/Wire-To-Board-Wire-To-Wire-Connector_HX-Zhejiang-Yueqing-Hongxing-Elec-HX20007-2AWB_C442222.html, ComponentLink3Description="LCSC link 3", ComponentLink3URL=https://www.lcsc.com/product-detail/Wire-To-Board-Wire-To-Wire-Connector_Shenzhen-Kinghelm-Elec-KH-A2001WF-02A_C2688784.html, ComponentLink4Description="New link", ComponentLink4URL=https://lcsc.com/product-detail/Wire-To-Board-Wire-To-Wire-Connector_HR-Joint-Tech-Elec-A2001WR-S-02PD01_C278789.html, Supplier 1=LCSC, Supplier 3=LCSC, Supplier 4=LCSC, Supplier Part Number 2=C442222, upplier 2=LCSC
J2: Supplier Part Number 1=C40951, ComponentLink1Description="LCSC link 1", ComponentLink1URL=https://lcsc.com/product-detail/USB-Connectors_Jing-Extension-of-the-Electronic-Co-920-A52A2021S10104_C40951.html, Supplier 1=LCSC
J3: "HEADER male 1x16 2.54mm", Supplier Part Number 1=C725948, ComponentLink1Description="LCSC link 1", ComponentLink1URL=https://lcsc.com/product-detail/Pin-Headers_XKB-Connectivity-X6511WV-16H-C30D60_C725948.html, Supplier 1=LCSC
J4: library part HDR_12, "HEADER male 1x12 2.54mm", Supplier Part Number 1=C225487, ComponentLink1Description="LCSC link 1", ComponentLink1URL=https://lcsc.com/product-detail/Pin-Headers_CJT-Changjiang-Connectors-A2541WV-12P_C225487.html, Supplier 1=LCSC
Q1: library part SI2301CDS-T1-GE3DKR-ND, "P Channel MOSFET 20V 3.1A 860mW 112mΩ@4.5V SOT-23-3", ComponentLink1Description="LCSC link 1", ComponentLink1URL=https://lcsc.com/product-detail/MOSFETs_Vishay-Intertech-SI2301CDS-T1-GE3_C10487.html, Supplier 1=Digi-Key, Supplier 2=LCSC, Supplier Part Number 1=SI2301CDS-T1-GE3DKR-ND, Supplier Part Number 2=C10487
Q2 Q3: library part MMBT2222A, "BJT NPN 40 V 600 mA 300MHz 300 mW SOT-23-3", Supplier Part Number 1=641-1942-1-ND, ComponentLink1Description="LCSC link 1", ComponentLink1URL=https://lcsc.com/product-detail/Bipolar-Transistors-BJT_Changjiang-Electronics-Tech-CJ-MMBT2222A-1P_C8512.html, Supplier 1=Digi-Key, Supplier 2=LCSC, Supplier Part Number 2=C8512
R1: library part EXB-38V104JV, "4 Resistor Array 10kΩ ±5% 1/16W 1206", Supplier Part Number 1=Y9104CT-ND, ComponentLink1Description="LCSC link 1", ComponentLink1URL=https://lcsc.com/product-detail/Resistor-Networks-Arrays_UNI-ROYAL-Uniroyal-Elec-4D03WGJ0103T5E_C29718.html, Supplier 1=Digi-Key, Supplier 2=LCSC, Supplier Part Number 2=C29718
R2 R3 R4 R5: library part 0603WAJ0104T5E, "RES SMD 100kΩ 5% 1/10W 0603", Supplier Part Number 1=C15458, ComponentLink1Description="LCSC link 1", ComponentLink1URL=https://lcsc.com/product-detail/Chip-Resistor-Surface-Mount_UNI-ROYAL-Uniroyal-Elec-0603WAJ0104T5E_C15458.html, Supplier 1=LCSC
R6 R8: library part 0603WAJ0102T5E, "RES SMD 1kΩ 5% 1/10W 0603", Supplier Part Number 1=C25585, ComponentLink1Description="LCSC link 1", ComponentLink1URL=https://lcsc.com/product-detail/Chip-Resistor-Surface-Mount_UNI-ROYAL-Uniroyal-Elec-0603WAJ0102T5E_C25585.html, Supplier 1=LCSC
R7: library part 0603WAF4701T5E, "RES SMD 4.7kΩ 1% 1/10W 0603", Supplier Part Number 1=C23162, ComponentLink1Description="LCSC link 1", ComponentLink1URL=https://lcsc.com/product-detail/Chip-Resistor-Surface-Mount_UNI-ROYAL-Uniroyal-Elec-0603WAF4701T5E_C23162.html, Supplier 1=LCSC
S1: library part GT-TC089B-H043-L1, "SPST tactile switch SMD 6x6x4.3mm", Supplier Part Number 1=C843624, ComponentLink1Description="LCSC link 1", ComponentLink1URL=C843624, Supplier 1=LCSC
U1: library part HT7833, "Linear Voltage Regulator IC Positive Fixed 3V3 Output 500mA 500mV@(500mA) SOT-23-5", Supplier Part Number 1=C164106, ComponentLink1Description="LCSC link 1", ComponentLink1URL=https://lcsc.com/product-detail/Linear-Voltage-Regulators-LDO_Holtek-Semicon-HT7833_C164106.html, Supplier 1=LCSC
U2: library part 336-4146-1-ND, "USB Bridge, USB to UART USB 2.0 UART Interface", Supplier Part Number 1=C47742, ComponentLink1Description="LCSC link 1", ComponentLink1URL=https://lcsc.com/product-detail/USB-ICs_SILICON-LABS-CP2104-F03-GMR_C47742.html, Supplier 1=LCSC, Supplier 2=Digi-Key, Supplier Part Number 2=336-4146-1-ND
U3: library part 1904-1023-1-ND, "BT, WiFi 802.11b/g/n, BT v4.2 +EDR, Class 1, 2 and 3 Transceiver Module 2.4GHz ~ 2.5GHz Integrated, Trace Surface Mount", Supplier Part Number 1=1965-ESP32-WROOM-32E-N4TR-ND, ComponentLink1Description="LCSC link 1", ComponentLink1URL=https://lcsc.com/product-detail/WiFi-Modules_Espressif-Systems-ESP32-WROOM-32_C82899.html, ComponentLink2Description="LCSC link 2", ComponentLink2URL=https://lcsc.com/product-detail/WiFi-Modules_Espressif-Systems-ESP32-WROOM-32D_C473012.html, Supplier 1=Digi-Key, Supplier 2=Digi-Key, Supplier 3=LCSC, Supplier 4=LCSC, Supplier Part Number 2=1904-1023-1-ND, Supplier Part Number 3=C82899, Supplier Part Number 4=C473012
U4: library part MCP73831T-2ACI/OTCT-ND, "Charger IC Lithium Ion/Polymer SOT-23-5 4.2V 500mA", ComponentLink1Description="LCSC link 1", ComponentLink1URL=C23162, Supplier 1=Digi-Key, Supplier 2=LCSC, Supplier Part Number 1=MCP73831T-2ACI/OTCT-ND, Supplier Part Number 2=C424093

## Free pads (board coordinates)
  round 3.505 hole 2.54 mask+0: ""(2.54,2.54) ""(2.54,20.32)
  round 2.286 hole 2.286 mask+0: ""(48.26,1.905) ""(48.26,20.955)

## Via types
v1: diameter 0.6, hole 0.3, Top Layer to Bottom Layer, tented both sides, 134 vias

## Nets (pads, with @x,y where several pads share a name; then routed paths per layer and width w, separated by ;. In a path a pad name is that pad's centre, name@x,y a point inside that pad or via, vN(x,y) a via of type N, cw(c..) or ccw(c..) an arc to the next point about the centre after c; other vN are vias at no path point)
3V3: C2.2 C3.2 C4.2 C6.1 J3.15 R1.5 U1.5 U2.5 U2.6 U2.7 U3.2 | length 74.1
  Top Layer w0.3: C6.1 8.141,9.449 8.787,8.803 8.787,7.163 ; J3.15 8.787,1.246 8.787,7.163 ; U2.5 U2.6 ; v1(10.863,7.038) 10.995,7.038 10.995,7.542 U2.7 10.993,7.735 10.983,7.745 10.922,7.745 10.616,8.051 10.616,8.112 10.478,8.25 U2.6 ; v1(16.307,9.493) 16.31,9.49 16.31,8.976 R1.5 ; U1.5 20.579,14.265 21.23,13.614 23.652,13.614 23.81,13.772 23.842,13.739 C3.2@23.967,13.739 ; v1(25.041,8.931) 25.018,8.953 24.867,8.953 24.118,9.702 C4.2 24.153,9.878 25.07,9.878 25.07,11.697 24.082,12.684 23.942,12.684 23.967,12.71 C3.2@23.967,13.739 ; U3.2 42.283,18.128 41.707,17.551 28.192,17.551 28.016,17.376 28.016,17.323 27.419,17.323 26.505,18.237 25.273,18.237 25.07,18.034 25.07,13.739 C3.2@23.967,13.739 ; 8.787,7.163 9.075,6.875 10.112,6.875 10.288,7.051 U2.6
  Bottom Layer w0.3: v1(10.863,7.038) 10.929,7.038 12.745,5.221 17.069,5.221 17.342,5.494 17.95,5.494 ; v1(16.307,9.493) 16.307,8.049 15.704,7.446 15.704,6.873 16.052,6.525 16.919,6.525 17.95,5.494 ; v1(25.041,8.931) 25.041,6.753 23.922,5.634 22.274,5.634 22.134,5.494 17.95,5.494
  other v1: 10.398,6.507 11.258,6.498 24.917,9.601
A0_DAC2: J3.12 U3.11 | length 28.2
  Top Layer w0.2: v1(29.718,18.796) 29.795,18.873 29.946,18.873 30.853,19.78 U3.11
  Bottom Layer w0.2: J3.12 16.778,1.411 17.39,1.411 18.773,2.794 22.979,2.794 23.06,2.875 23.062,2.875 23.311,3.124 24.206,3.124 28.264,7.182 28.499,7.417 28.499,17.577 v1(29.718,18.796)
A1_DAC1: J3.11 U3.10 | length 26.7
  Top Layer w0.2: v1(30.988,18.796) 31.096,18.796 31.245,18.945 31.288,18.945 32.123,19.78 U3.10
  Bottom Layer w0.2: J3.11 20.161,2.254 20.177,2.254 20.193,2.27 23.059,2.27 23.237,2.448 23.239,2.448 23.488,2.697 24.541,2.697 28.599,6.755 29.083,7.239 29.083,17.069 30.675,18.661 30.744,18.661 30.88,18.796 v1(30.988,18.796)
A2_I34: J3.10 U3.6 | length 29.8
  Top Layer w0.2: U3.6 37.367,19.766 v1@37.367,18.932
  Bottom Layer w0.2: J3.10 21.969,1.143 22.669,1.843 23.236,1.843 23.414,2.021 23.416,2.021 23.665,2.27 25.003,2.27 29.061,6.328 29.693,6.96 29.693,16.485 30.744,17.536 30.752,17.536 32.149,18.932 v1@37.367,18.932
  other v1: 37.338,18.923
A3_IO39: J3.9 U3.5 | length 28.1
  Top Layer w0.2: v1(38.354,18.923) 38.354,19.643 U3.5@38.556,19.844
  Bottom Layer w0.2: J3.9 24.536,1.143 24.925,1.532 24.968,1.532 29.337,5.901 30.328,6.892 30.328,16.154 32.309,18.136 37.617,18.136 v1@38.409,18.927
A4_IO36: J3.8 U3.4 | length 27.3
  Top Layer w0.2: v1(39.37,18.923) 39.37,19.004 39.443,19.077 39.443,19.63 U3.4
  Bottom Layer w0.2: J3.8 26.67,2.54 30.886,6.756 30.886,15.691 31.343,16.148 32.67,17.475 37.973,17.475 39.37,18.872 v1(39.37,18.923)
A5_IO4: J3.7 U3.26 | length 2.2
  Top Layer w0.2: U3.26 28.313,2.04 J3.7
A13_I35: R4.1 R5.2 U3.7 | length 19.3
  Top Layer w0.2: R4.1 R5.2 20.789,16.304 21.366,16.881 23.313,16.881 25.096,18.664 27.942,18.664 28.412,18.194 35.287,18.194 35.933,18.84 U3.7
DTR: Q2.2 R1.2 U2.23 | length 12.7
  Top Layer w0.2: v1@11.483,12.012 11.483,11.465 U2.23 ; v1(16.83,5.798) 16.83,5.873 17.03,6.073 17.503,6.073 17.907,6.477 R1.2@17.907,6.961 ; R1.2@17.968,7.022 R1.2@17.907,6.961 ; R1.2@17.968,7.38 R1.2@17.968,7.187 ; R1.2 R1.2@17.968,7.187 ; R1.2@17.907,6.961 17.907,7.126 R1.2@17.968,7.187
  Bottom Layer w0.2: v1(11.557,12.192) 12.268,11.481 13.157,11.481 14.097,10.541 14.097,7.62 15.919,5.798 v1(16.83,5.798)
EN: J4.2 R3.2 U1.3 | length 13
  Top Layer w0.2: R3.2 22.304,10.351 22.454,10.501 22.454,12.04 U1.3 v1(22.479,12.7)
  Bottom Layer w0.2: J4.2 22.479,18.288 v1(22.479,12.7)
GND: C1.1 C2.1 C3.1 C4.1 C5.1 C6.2 C7.1 D3.2 J1.1 J2.5 J2.7 J2.9 J3.13 R2.1 R5.1 R7.1 S1.3 S1.4 U1.2 U2.2 U2.25 U3.1 U3.15 U3.38 U3.39 U4.2 | length 21.5
  Top Layer w0.3: C6.2 8.484,11.658 v1(8.484,11.963) ; C7.1@16.459,17.729 16.358,17.729 16.307,17.781 v1(16.51,17.984) ; U4.2 19.025,19.964 v1(19.05,19.939) ; v1(21.692,15.646) 21.692,15.672 21.874,15.854 22.139,15.854 22.289,16.004 R5.1 ; R7.1 22.899,18.133 v1(23.006,18.026) ; C2.1@23.942,10.958 23.942,11.064 v1(23.952,11.074) ; C3.1@23.967,15.656 24.16,15.849 v1(23.978,15.849) ; C4.1 24.003,8.002 v1(24.003,8.28) ; v1(26.035,17.196) 26.137,17.297 26.137,17.239 U3.15 26.343,16.845 26.843,16.845 28.067,15.621 28.067,14.605 ; v1@41.402,13.843 43.053,15.494 43.053,17.898 43.009,17.942 43.009,18.154 v1(42.98,18.183) 42.98,18.701 43.253,18.974 43.253,19.63 U3.1 ; U3.38 43.553,3.167 v1(43.586,3.2)
  Top Layer w0.305: 1.95,7.823 2.47,7.823 ; 3.251,6.96 3.251,7.48 ; 3.251,8.23 3.251,8.452 ; 4.056,7.812 4.576,7.812 ; S1.3 9.389,3.951 9.564,4.126 10.388,4.126 11.011,4.749 11.151,4.749 10.414,5.486 v1(10.414,5.512)
  Top Layer w0.381: U2.2 U2.25@11.493,10.25
  other v1: 10.338,4.47 11.76,4.521 1.067,4.851 2.565,5.055 39.268,5.131 40.538,5.131 32.283,6.401 33.553,6.401 34.823,6.401 36.093,6.401 37.363,6.401 38.633,6.401 39.903,6.401 41.173,6.401 42.443,6.401 2.261,6.833 1.295,7.595 5.105,7.595 32.918,7.671 34.188,7.671 35.458,7.671 36.728,7.671 37.998,7.671 39.268,7.671 40.538,7.671 41.808,7.671 6.248,8.103 9.373,8.128 11.252,8.509 20.371,8.826 1.93,8.865 3.2,8.865 4.75,8.915 32.283,8.941 33.553,8.941 34.823,8.941 36.093,8.941 37.363,8.941 38.633,8.941 39.903,8.941 41.173,8.941 42.443,8.941 6.528,9.322 1.295,10.135 39.268,10.211 40.538,10.211 41.808,10.211 43.078,10.211 13.208,10.465 35.129,10.6 36.969,10.601 1.321,11.455 34.225,11.487 36.065,11.481 37.897,11.472 39.903,11.481 41.173,11.481 42.443,11.481 21.529,12.065 35.137,12.432 36.977,12.433 1.295,12.675 39.268,12.751 40.538,12.751 41.808,12.751 43.078,12.751 36.065,13.321 37.897,13.313 34.224,13.327 39.903,14.021 41.173,14.021 42.443,14.021 35.143,14.273 36.984,14.273 39.268,15.291 40.538,15.291 41.808,15.291 6.796,15.755 8.636,15.748 7.708,16.7 9.548,16.701 8.635,17.588 6.795,17.595 7.714,18.54 9.554,18.541
GPIO0: Q2.3 U3.25 | length 9.6
  Top Layer w0.2: Q2.3 17.78,3.373 17.98,3.173 18.361,3.173 18.604,2.93 U3.25
GPIO2: U3.24
IO12_A11: J4.5 U3.14 | length 1.9
  Top Layer w0.2: J4.5 26.743,21.644 26.743,20.23 U3.14
IO13_A12: J4.4 R8.2 U3.16 | length 41.8
  Top Layer w0.2: R8.2 5.382,4.482 5.969,3.896 v1(5.969,3.505) ; U3.16 26.875,15.875 27.076,15.674 v1(27.076,14.836)
  Bottom Layer w0.2: v1(5.969,3.505) 6.05,3.505 6.253,3.302 22.987,3.302 27.076,7.391 v1(27.076,14.836) 27.076,18.771 J4.4
IO14_A6: J4.10 U3.13 | length 13
  Top Layer w0.2: U3.13 28.448,19.795 v1(28.448,19.05)
  Bottom Layer w0.2: v1(28.448,19.05) 29.083,19.685 37.338,19.685 J4.10
IO15_A8: J4.8 U3.23 | length 21.2
  Top Layer w0.2: U3.23 27,6.985 v1(27.788,7.772)
  Bottom Layer w0.2: v1(27.788,7.772) 27.788,19.533 28.677,20.422 32.995,20.422 J4.8
IO16: J3.3 U3.27 | length 11.7
  Top Layer w0.2: U3.27 29.883,3.23 29.883,3.767 29.972,3.856 v1(29.972,3.937)
  Bottom Layer w0.2: v1(29.972,3.937) 31.496,2.413 37.958,2.413 39.228,1.143 J3.3
IO17: J3.2 U3.28 | length 12.9
  Top Layer w0.2: v1(30.988,3.937) 30.988,3.095 U3.28@31.003,3.08
  Bottom Layer w0.2: v1(30.988,3.937) 31.877,3.048 32.207,3.048 40.005,3.048 J3.2
IO21: J3.1 U3.33 | length 9.7
  Top Layer w0.2: v1(37.059,3.962) 37.059,3.074 U3.33
  Bottom Layer w0.2: v1(37.059,3.962) 37.14,3.962 37.284,3.818 41.038,3.818 43.462,1.394 44.199,1.394 J3.1
IO27_A10: J4.6 U3.12 | length 1.9
  Top Layer w0.2: J4.6 29.283,21.644 29.283,20.23 U3.12
IO32_A7: J4.9 U3.8 | length 2.6
  Top Layer w0.2: U3.8@34.963,20.23 34.963,20.402 36.01,21.449 36.562,21.449 J4.9
IO33_A9: J4.7 U3.9 | length 2.5
  Top Layer w0.2: J4.7 31.778,21.717 32.85,20.645 32.85,20.623 33.393,20.08 U3.9
MISO: J3.4 U3.31 | length 3
  Top Layer w0.2: U3.31 35.013,2.58 35.013,2.417 36.287,1.143 J3.4
MOSI: J3.5 U3.30 | length 2.2
  Top Layer w0.2: U3.30 33.393,2.04 J3.5
NetC5_2: C5.2 D1.2 Q1.2 R3.1 U1.1 | length 8.2
  Top Layer w0.2: D1.2@18.702,10.693 19.101,11.092 Q1.2 20.434,12.296 20.579,12.151 U1.1 U1.1@20.574,12.06 ; U1.1@20.779,11.479 21.158,11.1 21.158,10.225 21.96,9.424 21.96,9.001 22.11,8.851 R3.1 22.174,7.341 C5.2
NetD2_1: D2.1 R6.2 | length 1.7
  Top Layer w0.2: 3.362,16.84 3.477,16.725 R6.2
NetD3_1: D3.1 R8.1 | length 1.7
  Top Layer w0.2: D3.1 3.731,5.982 R8.1
NetJ2_2: J2.2 U2.4 | length 6.6
  Top Layer w0.2: J2.2 5.951,12.03 6.784,12.03 6.96,11.854 6.96,10.489 7.135,10.313 9.048,10.313 9.234,10.128 9.234,9.685 9.66,9.26 10.278,9.26 U2.4
NetJ2_3: J2.3 U2.3 | length 8.3
  Top Layer w0.2: v1(4.902,11.43) J2.3 ; v1(9.627,11.455) 9.661,11.421 9.661,10.003 9.904,9.76 10.278,9.76 U2.3 9.961,9.75 U2.3@9.957,9.754
  Bottom Layer w0.2: v1(4.902,11.43) 9.601,11.43 v1(9.627,11.455)
NetQ2_1: Q2.1 R1.7 | length 6
  Top Layer w0.2: R1.7 15.413,8.808 15.667,8.553 15.687,8.553 16.006,8.234 16.006,8.218 18.325,8.218 18.73,7.813 Q2.1
NetQ3_1: Q3.1 R1.1 | length 9
  Top Layer w0.2: Q3.1@15.482,5.442 16.099,4.826 18.989,4.826 19.14,4.977 19.156,4.977 19.307,5.129 19.307,8.125 18.616,8.816 18.022,8.816 18.013,8.808 R1.1
NetR6_1: R6.1 U4.1 | length 16
  Top Layer w0.2: R6.1 4.984,18.231 6.115,18.231 v1(6.121,18.237) ; v1(19.939,19.761) 19.939,19.838 19.837,19.939 U4.1
  Bottom Layer w0.2: v1(6.121,18.237) 7.246,19.362 19.289,19.362 19.688,19.761 v1(19.939,19.761)
NetR7_2: R7.2 U4.5 | length 1.7
  Top Layer w0.2: U4.5 21.132,17.566 21.399,17.833 R7.2
RESET: C1.2 J3.16 Q3.3 R1.6 S1.1 S1.2 U3.3 | length 59.9
  Top Layer w0.2: J3.16 6.35,1.203 7.239,2.092 S1.1 S1.2 ; v1(10.185,2.311) 10.243,2.369 10.356,2.369 11.011,3.023 C1.2@11.151,3.023 ; C1.2@10.63,3.404 14.202,3.404 14.247,3.449 Q3.3@14.247,3.678 ; Q3.3 14.402,6.147 14.732,6.477 15.783,6.477 16.313,7.008 R1.6 ; v1(21.895,6.071) 24.051,3.915 v1@28.948,3.915 ; v1(40.386,18.923) 40.443,18.98 40.921,18.98 40.921,19.733 40.869,19.786 U3.3
  Bottom Layer w0.2: J3.16 7.518,2.311 v1(10.185,2.311) ; v1(16.281,7.112) 17.526,7.112 18.517,6.121 v1@21.895,6.121 ; v1@28.985,3.915 31.496,6.426 31.496,15.261 33.126,16.891 38.506,16.891 40.236,18.621
  other v1: 28.956,3.937
RTS: Q3.2 R1.8 U2.19 | length 8.4
  Top Layer w0.2: Q3.2 13.452,5.873 14.939,7.36 15.388,7.36 15.469,7.44 v1(15.469,8.026) ; U2.19 13.493,11.458 13.503,11.468 13.938,11.468 13.951,11.481 v1(14.072,11.481)
  Bottom Layer w0.2: v1(14.072,11.481) 14.072,11.405 14.605,10.871 14.605,8.28 14.802,8.084 15.411,8.084 v1(15.469,8.026)
RXD0: U2.20 U3.34 | length 34.9
  Top Layer w0.2: U2.20 13.003,11.465 13.003,11.838 13.966,12.802 v1(13.995,12.802) ; v1(22.987,6.248) 23.044,6.191 23.273,6.191 24.938,4.526 30.074,4.526 30.087,4.539 37.421,4.539 38.173,3.788 38.173,3.23 U3.34
  Bottom Layer w0.2: v1(13.995,12.802) 14.053,12.744 14.383,12.744 15.672,11.455 17.755,11.455 18.263,10.947 18.263,8.093 18.794,7.562 23.785,7.562 24.123,7.224 24.123,6.746 23.683,6.306 23.044,6.306 v1(22.987,6.248)
SCK: J3.6 U3.29 | length 1.9
  Top Layer w0.2: J3.6 31.823,1.216 31.823,2.63 U3.29
SCL: J4.11 U3.36 | length 21.1
  Top Layer w0.2: U3.36 41.313,3.23 41.313,4.026 42.494,5.207 43.205,5.207 43.688,5.69 43.688,17.45 v1(43.713,17.45)
  Bottom Layer w0.2: J4.11 43.713,19.914 v1(43.713,17.45)
SDA: J4.12 U3.37 | length 20.4
  Top Layer w0.2: U3.37 42.189,3.024 42.189,4.039 42.774,4.623 43.84,4.623 44.45,5.232 J4.12
TXD0: U2.21 U3.35 | length 33.7
  Top Layer w0.2: v1(12.446,12.192) 12.504,12.134 12.504,11.951 12.494,11.941 U2.21@12.494,11.455 ; v1(23.139,6.985) 23.331,6.985 25.363,4.953 29.897,4.953 29.91,4.966 37.878,4.966 39.231,3.614 39.231,3.592 39.743,3.08 U3.35
  Bottom Layer w0.2: v1(12.446,12.192) 14.176,12.192 14.649,11.72 14.649,11.717 15.392,10.973 17.604,10.973 17.78,10.797 17.78,7.874 18.669,6.985 v1(23.139,6.985)
VBAT: C7.2 J1.2 J4.1 Q1.3 R4.2 U4.3
VBUS: D1.1 D2.2 J2.1 J4.3 Q1.1 R2.2 U2.8 U4.4 | length 9.9
  Top Layer w0.203: 17.981,9.666 18.438,9.666
  Top Layer w0.3: U2.8 11.503,7.535 11.503,7.161 11.746,6.918 13.854,6.918 14.834,7.897 14.834,10.008 14.91,10.084 14.91,10.16 ; 18.46,9.643 19.538,9.643 20.221,10.326 R2.2
  Top Layer w0.305: 17.475,10.312 17.475,10.082 17.84,9.717
pads on no net: J1.S1 J1.S2 J2.4 J2.6 J2.8 J2.10 J2.11 J3.14 R1.3 R1.4 U1.4 U2.1 U2.9 U2.10 U2.11 U2.12 U2.13 U2.14 U2.15 U2.16 U2.17 U2.18 U2.22 U2.24 U3.17 U3.18 U3.19 U3.20 U3.21 U3.22 U3.32

## Polygon pours and split planes (outlines as drawn)
VBUS on Top Layer "VBUS_POLY" (solid, remove dead copper, pour order 4): 12.501,13.517 12.501,14.478 13.193,14.478 13.328,14.344 13.335,14.351 17.516,14.351 17.526,14.341 17.526,13.843 18.669,13.843 18.669,15.113 17.921,15.113 17.921,16.859 17.921,19.177 19.431,19.177 20.447,20.193 20.447,22.606 22.733,22.606 22.733,19.558 21.844,19.558 19.431,17.145 19.431,10.009 14.732,10.01 14.732,13.335 13.716,13.335 12.827,12.446 4.194,12.446 4.194,13.589 0.762,13.589 0.762,17.907 2.159,17.907 2.159,14.341 8.636,14.341 8.636,13.335 12.319,13.335
3V3 on Top Layer "NONET_L01_P-001" (solid, remove dead copper, pour order 2): 25.273,8.636 25.273,16.764 42.291,16.764 42.672,17.145 42.672,20.701 41.656,20.701 41.656,18.415 27.178,18.415 26.797,18.796 24.765,18.796 24.765,14.732 23.241,14.732 22.606,14.097 21.59,14.097 21.082,14.605 21.082,15.367 19.939,15.367 19.939,13.589 20.447,13.589 20.955,13.081 22.86,13.081 22.86,9.398 23.368,8.89 24.257,8.89 24.511,8.636
VBAT on Top Layer "NONET_L01_P-001" (solid, remove dead copper, pour order 1): 11.247,13.462 11.247,17.082 11.247,14.478 17.653,14.478 17.653,14.097 18.161,14.097 18.161,16.764 17.78,16.764 17.78,19.304 18.542,19.304 18.542,20.828 17.78,20.828 17.78,22.606 15.24,22.606 15.24,17.653 11.247,17.653
GND on Top Layer "GND_L01_P021" (solid, remove dead copper, pour order 21): 0.762,22.606 0.762,14.732 8.89,14.732 8.89,13.462 10.922,13.462 10.922,17.78 15.24,17.78 15.24,19.304 13.462,19.304 13.462,22.606
GND on Top Layer "GND_L01_P018" (solid, remove dead copper, pour order 18): 0.762,13.589 6.809,13.589 6.809,8.28 3.101,4.572 0.789,4.572
GND on Top Layer "GND_L01_P-001" (solid, remove dead copper, pour order 16): 33.201,16.891 33.201,9.529 38.995,9.529 38.995,16.891 42.164,16.891 42.418,17.145 42.672,17.145 42.672,20.701 42.799,20.828 44.323,20.828 44.323,18.059 43.688,17.424 43.688,5.69 41.681,3.683 39.624,3.683 37.871,5.334 27.051,5.334 27.178,5.461 27.178,15.972 26.894,16.256 25.273,16.256 25.273,17.679 25.316,17.722 26.77,17.722 26.77,17.582 27.512,16.84 27.563,16.891
3V3 on Top Layer "NONET_L01_P-001" (solid, remove dead copper, pour order 3): 11.303,6.961 11.33,6.934 11.582,6.934 11.582,6.096 9.525,6.096 9.525,1.016 10.16,0.127 7.62,0.127 7.62,1.524 7.047,2.097 7.047,10.401 10.528,10.401 10.541,10.414 11.303,9.652
GND on Top Layer "GND_L01_P020" (solid, remove dead copper, pour order 20): 12.344,6.045 12.344,4.166 12.04,3.861 10.084,3.861 10.084,2.921 10.012,2.849 8.937,2.849 8.937,4.403 9.525,4.403 9.525,6.045
GND on Top Layer "GND_L01_THERMAL" (solid, remove dead copper, pour order 17): 39.247,9.271 39.239,16.891 33.02,16.891 33.02,9.271
GND on Top Layer "GND_L01_P019" (solid, remove dead copper, pour order 19): 19.761,9.246 19.761,6.401 21.057,6.401 21.057,9.246
GND on Bottom Layer "GND_L02_P013" (solid, remove dead copper, pour order 13): 31.88,3.68 30.709,4.851 30.709,5.182 31.928,6.401 31.937,15.062 33.334,16.459 34.722,16.459 39.141,16.459 40.767,18.085 40.767,22.86 44.704,22.811 44.704,1.626 43.603,1.626 43.585,1.608 41.514,3.68
GND on Bottom Layer "NONET_L01_P-001" (solid, remove dead copper, pour order 12): 18.951,7.874 18.683,8.142 18.697,8.156 18.697,11.021 17.856,11.862 15.723,11.862 14.326,13.259 13.665,13.259 13.106,12.7 11.366,12.7 11.049,12.382 11.049,12.065 11.963,11.151 12.979,11.151 13.716,10.414 13.716,7.366 10.033,7.366 10.033,5.969 11.176,5.969 13.272,3.873 17.374,3.873 17.374,0.127 0.254,0.127 0.254,0.381 0.254,19.684 0.254,22.606 24.384,22.606 24.384,20.828 26.67,18.542 26.67,10.148 24.626,10.148 24.384,9.906 24.384,7.874
3V3 on Bottom Layer "NONET_L01_P-001" (solid, remove dead copper, pour order 5): 24.511,6.604 23.876,5.969 23.314,5.969 18.288,5.969 17.399,6.858 17.399,10.668 15.113,10.668 14.859,10.414 14.859,7.366 10.033,7.366 10.033,6.096 11.303,6.096 13.716,3.683 22.86,3.683 26.67,7.493 26.67,10.033 24.511,10.033

## Other copper
Top Layer:
  pour cut-out: 2.21,7.264 2.286,7.188 4.445,7.188 4.445,8.511 2.21,8.511

## Silkscreen, mask and mechanical layers (free items; w line width, h text height)
Top Overlay:
  drawing of 49 lines, arcs and shapes, not listed
  text "14" at 40.827,21.454 h0.4 r90
  text "13" at 25.6,21.441 h0.4 r90
  text "15" at 35.735,21.439 h0.4 r90
  text "12" at 28.126,21.403 h0.4 r90
  text "27" at 30.645,21.412 h0.4 r90
  text "33" at 33.207,21.376 h0.4 r90
  text "32" at 38.275,21.377 h0.4 r90
  text "EN" at 20.52,21.364 h0.4 r90
  text "SDA" at 46.047,21.266 h0.4 r90
  text "SCL" at 43.361,21.243 h0.4 r90
  text "BAT" at 17.955,21.161 h0.4 r90
  text "USB" at 23.06,21.161 h0.4 r90
  text "Remake by A.Chabira" at 28.07,16.64 h0.76
  text "#13" at 0.937,15.954 h0.76 r90
  text "original desgin by Adafruit" at 27.689,8.969 h0.76
  text "https://github.com/adafruit" at 27.74,7.471 h0.76
  text "RESET" at 10.468,6.074 h0.76
  text "/Adafruit-HUZZAH32-" at 27.714,6.023 h0.76
  text "huzzah!" at 19.967,5.108 h0.76
  text "CHG" at 0.937,4.981 h0.76 r90
  text "ESP32-Feather-PCB" at 27.613,4.55 h0.76
  text "A0" at 15.897,2.461 h0.8
  text "A1" at 18.564,2.435 h0.8
  text "A2" at 21.003,2.435 h0.8
  text "A3" at 23.441,2.435 h0.8
  text "GND" at 12.925,2.359 h0.8
  text "3V" at 8.226,2.257 h0.8
  text "RST" at 5.28,2.232 h0.8
  text "NC" at 13.053,0.917 h0.4 r90
  text "MI" at 38.373,0.882 h0.5 r90
  text "RX" at 40.921,0.83 h0.5 r90
  text "MO" at 35.836,0.789 h0.5 r90
  text "A4" at 28.205,0.759 h0.5 r90
  text "A5" at 30.741,0.77 h0.5 r90
  text "TX" at 43.456,0.748 h0.5 r90
  text "21" at 46.482,0.705 h0.8 r90
  text "SCK" at 33.304,0.536 h0.5 r90
Bottom Overlay:
  drawing of 13 lines, arcs and shapes, not listed
  text "3.7/4.2V" at 13.425,21.516 h0.86
  text "BAT" at 16.906,20.013 h0.86 r90
  text "USB" at 22.113,20.013 h0.86 r90
  text "LiPoly Batt" at 14.504,19.992 h0.86
  text "33/A9" at 32.273,19.987 h0.86 r90
  text "32/A7" at 37.226,19.987 h0.86 r90
  text "En" at 19.446,19.962 h0.86 r90
  text "15/A8" at 34.686,19.915 h0.86 r90
  text "14/A6" at 39.766,19.915 h0.86 r90
  text "SCL/22" at 42.433,19.911 h0.86 r90
  text "SDA/23" at 44.846,19.911 h0.86 r90
  text "27/A10" at 29.606,19.839 h0.86 r90
  text "13/A12" at 24.526,19.767 h0.86 r90
  text "12/A11" at 27.066,19.623 h0.86 r90
  text "ÂµUSB charge" at 15.008,18.468 h0.86
  text "ESP32 Feather" at 21.895,15.9 h1.08
  text "8MB Flash" at 21.895,13.995 h1.08
  text "WiFI+BT" at 21.895,12.09 h1.08
  text "MOSI/18" at 34.813,8.514 h0.86 r90
  text "MISO/19" at 37.353,8.514 h0.86 r90
  text "RX/16" at 39.766,6.961 h0.86 r90
  text "TX/17" at 42.433,6.961 h0.86 r90
  text "A2/34" at 21.986,6.906 h0.86 r90
  text "A3/39" at 24.526,6.906 h0.86 r90
  text "A4/36" at 27.193,6.906 h0.86 r90
  text "SCK/5" at 32.146,6.906 h0.86 r90
  text "DAC2" at 17.668,6.093 h0.86 r90
  text "A5/4" at 29.606,6.093 h0.86 r90
  text "DAC1" at 20.335,6.076 h0.86 r90
  text "A0" at 16.144,5.23 h0.86 r90
  text "A1" at 18.811,5.213 h0.86 r90
  text "RST" at 6.873,5.154 h0.86 r90
  text "GND" at 14.366,5.154 h0.86 r90
  text "3V" at 9.413,4.341 h0.86 r90
  text "NC" at 11.826,4.341 h0.86 r90
  text "21" at 44.846,4.197 h0.86 r90
Board Outline (M1):
  lines w0.15: 0,2.667 0,20.32 ; 2.667,0 48.133,0 ; 2.667,22.86 48.26,22.86 ; 50.8,2.667 50.8,20.193
  lines w0.152: 0,2.667 ccw(c2.667,2.667) 2.667,0 ; 0,20.193 cw(c2.667,20.193) 2.667,22.86 ; 48.133,0 ccw(c48.133,2.667) 50.8,2.667 ; 48.133,22.86 cw(c48.133,20.193) 50.8,20.193
Manufacturing Notes (M2):
  lines w0.254: -0.5,-54.7 95.903,-54.7 95.903,-44.625 ; -0.5,-54.625 -0.5,-44.625 ; -0.5,-34.7 95.987,-34.7 ; 39.5,-44.7 39.5,-34.7 ; 74.5,-34.7 74.5,-27.2 ; -0.5,-44.7 95.91,-44.7 95.91,-27.2 -0.5,-27.2 -0.5,-44.7
  text "Board info" at 69.4,90.02 h1.52
  text "Minimum Track: 200um" at 69.4,87.52 h1.52
  text "Files checklist" at 0.254,87.48 h1.52